# Altium PCB Power.PcbDoc
Units mm, origin at the board's own origin, x right, y up, seen from the top; angles counter-clockwise.
Board outline 56.52 x 52.07 mm, 2 copper layers (Top Layer, Bottom Layer); 56 components, 47 nets, 171 pads, 39 vias.
Unrouted connection lines stored in the file: 1.
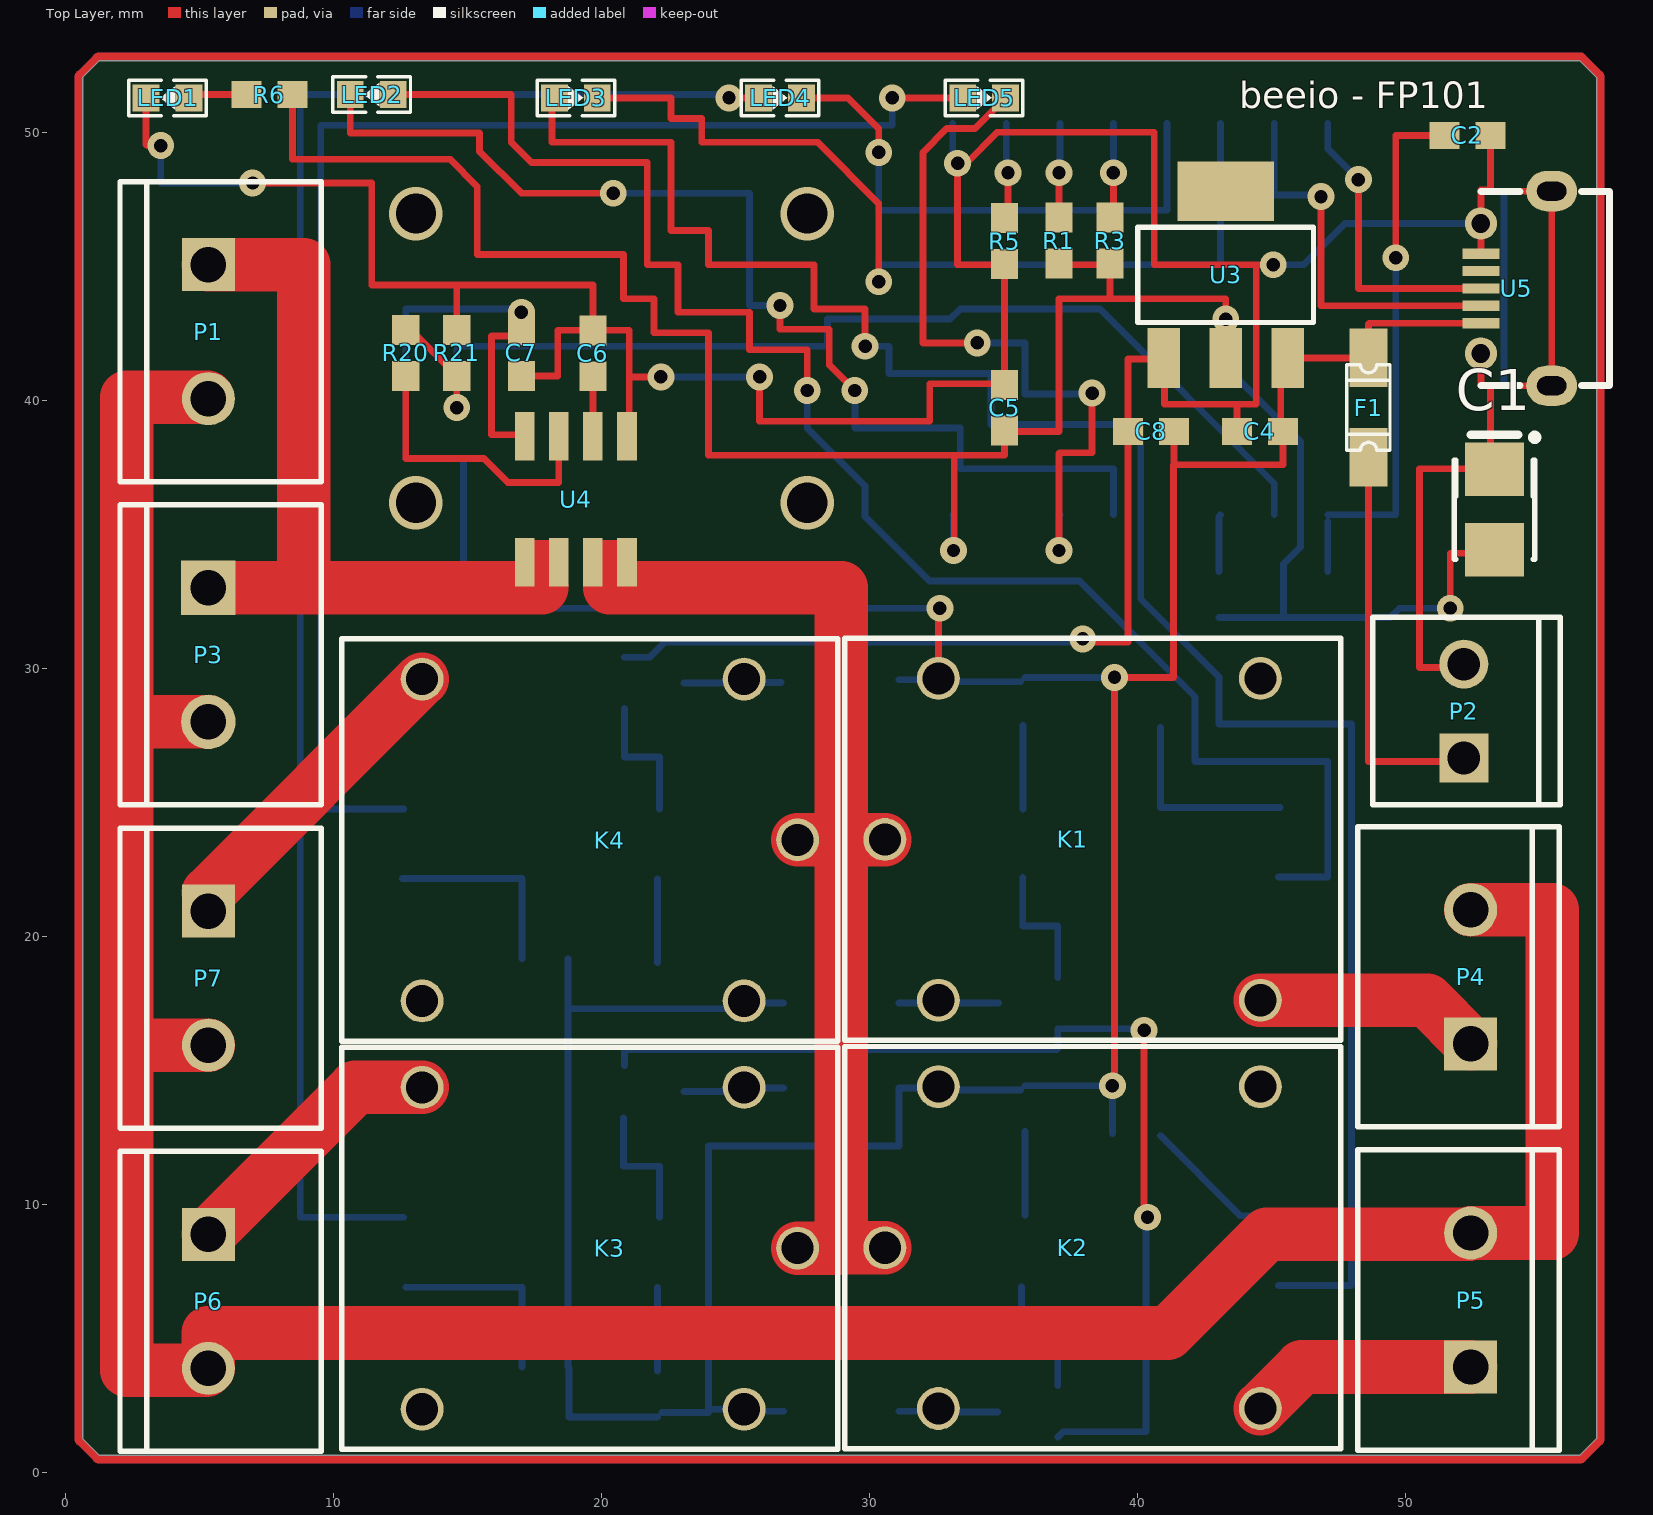
[diagram p0: Top Layer view]
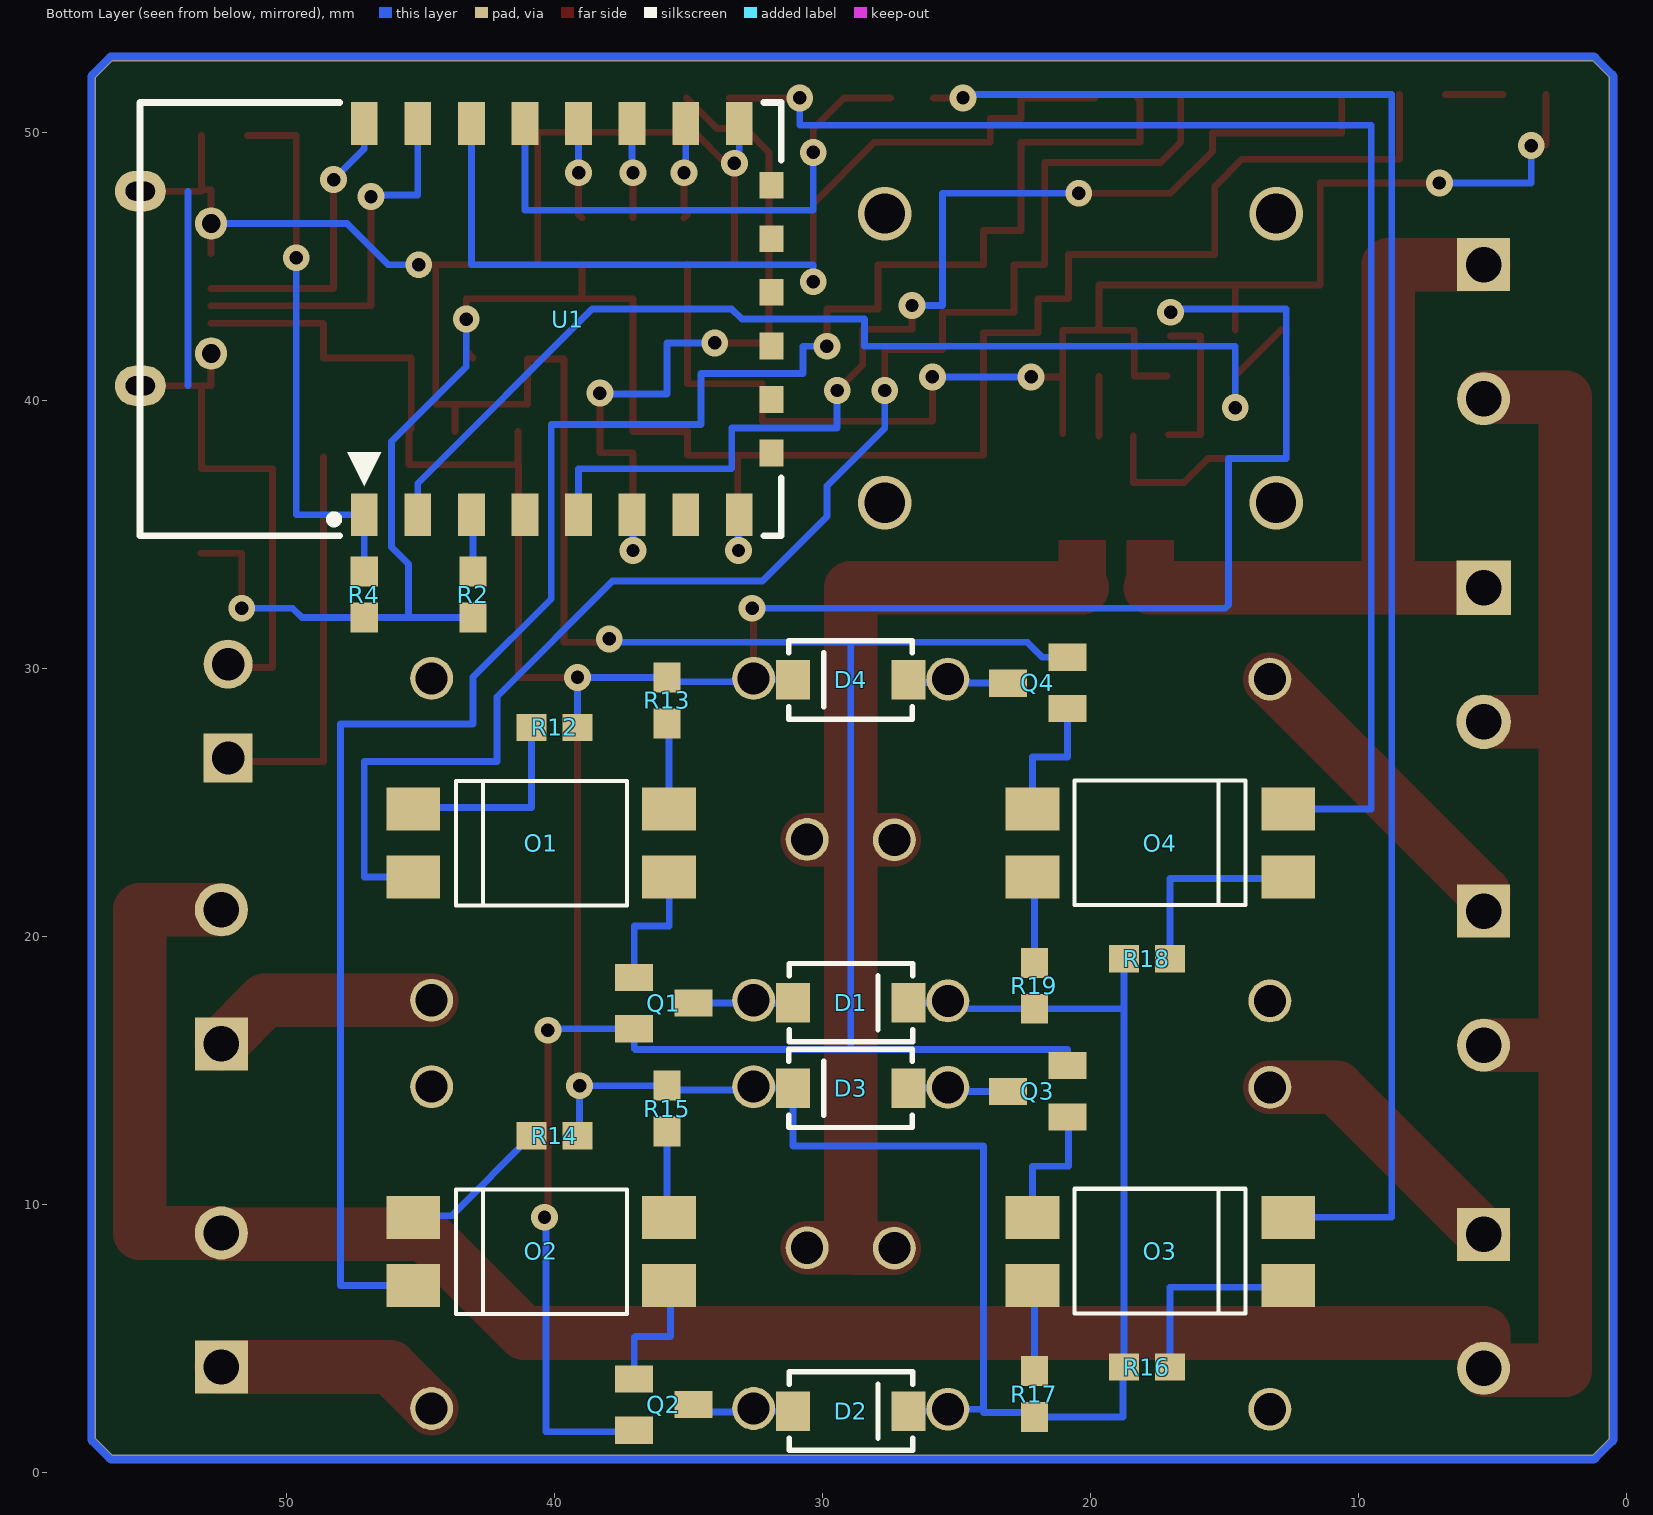
[diagram p1: Bottom Layer view, seen from below]

## Layer stack, top to bottom
Top Solder: solder mask 0.0102, Solder Resist, Dk 3.5
Top Layer: signal copper 0.0356
Dielectric 1: dielectric 0.32, FR-4, Dk 4.8
Bottom Layer: signal copper 0.0356
Bottom Solder: solder mask 0.0102, Solder Resist, Dk 3.5

## Board outline
0.635,1.27 0.635,52.07 1.27,52.705 56.515,52.705 57.15,52.07 57.15,1.27 56.515,0.635 1.27,0.635

## Design rules (kind name [scope] priority, off if disabled: settings)
Clearance [All] p1: gap=0.254
PolygonConnect [All] p1: connectstyle=Relief reliefconductorwidth=0.254 reliefentries=4 polygonreliefangle="90 Angle" airgapwidth=0.254
RoomDefinition Power [InComponentClass('Power')] p1: confinementstyle=ConfineIn formatcopy=TRUE lockcomponents=FALSE outline 0.635,0.635 57.15,0.635 57.15,52.705 0.635,52.705
RoutingVias [All] p1: holewidth=0.711 width=1.27 viastyle="Through Hole" minholewidth=0.711 minwidth=1.27 maxholewidth=0.711 maxwidth=1.27
SolderMaskExpansion [All] p1: expansion=0.102
Width [All] p1: maxlimit=0.254 minlimit=0.254 preferedwidth=0.254
30 further rules are at their usual default settings.

## Components (designator, comment, footprint, x,y, rotation, side; value= is the part's Value field where it differs from the comment)
C1 "100uF 6V3" SMT_C_Tantalum_B 53.34,35.941 r270 top
C2 "100nF" 0603 52.324,49.911 r0 top
C4 "10uF" 0603 44.577,38.862 r0 top
C5 "10uF" 0603 35.052,39.751 r270 top
C6 "1nF" 0603 19.685,41.783 r270 top
C7 "100nF" 0603 17.018,41.783 r90 top
C8 "100nF" 0603 40.513,38.862 r0 top
D1 "1N4007" SMA-DIODE 28.956,17.526 r180 bottom
D2 "1N4007" SMA-DIODE 28.956,2.286 r180 bottom
D3 "1N4007" SMA-DIODE 28.956,14.351 r0 bottom
D4 "1N4007" SMA-DIODE 28.956,29.591 r0 bottom
F1 "1A 6V SMD1206" 1206L 48.641,39.751 r90 top
K1 "SRD-5V" SRD-05VDC-SL-C 37.973,23.749 r0 top
K2 "SRD-5V" SRD-05VDC-SL-C 37.973,8.509 r0 top
K3 "SRD-5V" SRD-05VDC-SL-C 19.939,8.255 r180 top
K4 "SRD-5V" SRD-05VDC-SL-C 19.939,23.495 r180 top
LED1 "BLUE" SMT_LED_0603 3.81,51.308 r180 top
LED2 "RED" SMT_LED_0603 11.43,51.435 r180 top
LED3 "RED" SMT_LED_0603 19.05,51.308 r0 top
LED4 "RED" SMT_LED_0603 26.67,51.308 r0 top
LED5 "RED" SMT_LED_0603 34.29,51.308 r0 top
O1 "PC817" DIL4-SMD 40.513,23.495 r270 bottom
O2 "PC817" DIL4-SMD 40.513,8.255 r270 bottom
O3 "PC817" DIL4-SMD 17.399,8.255 r90 bottom
O4 "PC817" DIL4-SMD 17.399,23.495 r90 bottom
P1 "PWR 220V IN" SCREWTERMINAL-5MM-2#1 5.334,45.085 r270 top
P2 "PWR 5V 800mA OUT" SCREWTERMINAL-3.5MM-2 52.197,26.67 r90 top
P3 "AC/DC" SCREWTERMINAL-5MM-2#2 5.334,33.02 r270 top
P4 "LAMP" SCREWTERMINAL-5MM-2#1 52.451,16.002 r90 top
P5 "PUMP" SCREWTERMINAL-5MM-2#1 52.451,3.937 r90 top
P6 "FAN" SCREWTERMINAL-5MM-2#1 5.334,8.89 r270 top
P7 "FOG" SCREWTERMINAL-5MM-2#1 5.334,20.955 r270 top
Q1 "C1815" SOT23 35.941,17.526 r270 bottom
Q2 "C1815" SOT23 35.941,2.54 r270 bottom
Q3 "C1815" SOT23 21.971,14.224 r90 bottom
Q4 "C1815" SOT23 21.971,29.464 r90 bottom
R1 "103" 0603 37.084,45.974 r90 top
R2 "103" 0603 43.053,32.766 r90 bottom
R3 "103" 0603 38.989,45.974 r90 top
R4 "103" 0603 47.117,32.766 r90 bottom
R5 "103" 0603 35.052,45.974 r270 top
R6 "470" 0603 7.62,51.435 r180 top
R12 "102" 0603 40.005,27.813 r0 bottom
R13 "561" 0603 35.814,28.829 r270 bottom
R14 "102" 0603 40.005,12.573 r0 bottom
R15 "561" 0603 35.814,13.589 r270 bottom
R16 "102" 0603 17.907,3.937 r180 bottom
R17 "561" 0603 22.098,2.921 r90 bottom
R18 "102" 0603 17.907,19.177 r180 bottom
R19 "561" 0603 22.098,18.161 r90 bottom
R20 "224 (1%)" 0603 12.7,41.783 r90 top
R21 "104 (1%)" 0603 14.605,41.783 r90 top
U1 "ESP_12_E" ESP_12_E_L 47.117,35.052 r90 bottom
U3 "LM1117 3v3" SOT223 43.307,44.704 r0 top
U4 "ACS712 20A" SO08 19.05,36.322 r0 top
U5 "Micro USB B 5S DIP" USB_MICRO_5S_B 52.832,44.196 r270 top

## Footprints (in the part's own frame and the unit in brackets; to place one, negate y for a bottom-side part, rotate by r counter-clockwise, add the part's x,y. Pads: shape width x height; smd on the part's side, far side on the other; paste and mask are expansions set on the pad)
0603 [mil]
  rect 44x40 smd: 1(-33.46,0) 2(34,0)
1206L [mil]
  rect 86x56 smd: P$1(-72.83,0) P$2(73,0)
  silkscreen extent -63,-31 63,32
DIL4-SMD [mil]
  rect 63x79 smd: 1(-50,-187.8) 2(50,-187.8) 3(50,188) 4(-50,188)
  silkscreen extent -91,-125 92,126
ESP_12_E_L [mm]
  rect 1.6x1 smd: 1(0.7,0) 2(0.7,-2) 3(0.7,-4) 4(0.7,-6) 5(0.7,-8) 6(0.7,-10) 7(0.7,-12) 8(0.7,-14) 15(15.3,-14) 16(15.3,-12) 17(15.3,-10) 18(15.3,-8) 19(15.3,-6) 20(15.3,-4) 21(15.3,-2) 22(15.3,0)
  rect 1x0.9 smd: 9(3,-15.2) 10(5,-15.2) 11(7,-15.2) 12(9,-15.2) 13(11,-15.2) 14(13,-15.2)
  silkscreen extent -0.08,-15.57 16.08,8.37, body extent 0,-15.49 16,8.51, height 2.75
SCREWTERMINAL-3.5MM-2 [mil]
  rect 72x72 hole 48: 1(0,0)
  round 72 hole 48: 2(138,0)
  silkscreen extent -69,-142 207,134
SCREWTERMINAL-5MM-2#1 [mil]
  rect 78x78 hole 52: 1(0,0)
  round 78 hole 52: 2(197,0)
  silkscreen extent -122,-130 319,166
SCREWTERMINAL-5MM-2#2 [mil]
  rect 80x80 hole 52: 1(0,0)
  round 80 hole 52: 2(197,0)
  silkscreen extent -122,-130 319,166
SMA-DIODE [mil]
  rect 50x58 smd: A(-84.65,0) C(85,0)
  silkscreen extent -91,-57 91,58
SMT_C_Tantalum_B [mm]
  rect 2x2.2 smd: 1(-1.5,0) 2(1.5,0)
  silkscreen extent -2.82,-1.5 1.85,1.63, body extent -1.75,-1.4 1.75,1.4, height 1.9
SMT_LED_0603 [mm]
  rect 1x1 smd: 1(-0.8,0) 2(0.8,0)
  silkscreen extent -1.45,-0.66 1.45,0.66, body extent -0.81,-0.4 0.81,0.4, height 0.6
SO08 [mil]
  rect 29x71 smd: 1(-75,-92.52) 2(-25,-92.52) 3(25,-92.52) 4(75,-92.52) 5(75,93) 6(25,93) 7(-25,93) 8(-75,93)
SOT23 [mil]
  rect 40x56 smd: 1(-37.4,-43.31) 2(38,-43.31) 3(0,44)
SOT223 [mil]
  rect 48x88 smd: 1(-91,-122) 2(0,-122) 3(91,-122)
  rect 142x87 smd: 4(0,123)
  silkscreen extent -129,-70 129,70
SRD-05VDC-SL-C [mm]
  round 1.6 hole 1.2: COIL0(-5.39,-6.12) COIL1(-5.39,5.893) SWCLOSED(6.629,-6.12) SWCOMMON(-7.39,-0.12) SWOPEN(6.629,5.893)
  silkscreen extent -8.89,-7.62 9.63,7.39
USB_MICRO_5S_B [mil]
  rect 15x54 smd: 1(51,0) 2(25.5,0) 3(0,0) 4(-25.5,0) 5(-51,0)
  oval 59.06x74.8 hole 27.56 slot 43.31 at 90 deg: 6(-143,104) 7(143,104)
  round 47.24 hole 27.5: 8(95.5,0) 9(-95.5,0)
  silkscreen extent -143,0 143,189, body extent -161,-9 161,204, height 105

## Part data
C1: library part SMT_C_Tantalum_B, "Capacitor, SM Tantalum; Body 3.5 x 2.8 mm (LxW typ)"
C2 C4 C5 C6 C7 C8: library part CAP0603
D1 D2 D3 D4: library part DIODESMA
F1: library part 1206L
K1 K2 K3 K4: library part RELAYPTH
LED1 LED2 LED3 LED4 LED5: library part SMT_LED_0603, "SMT LED"
P1 P3 P4 P5 P6 P7: library part M025MM
P2: library part M023.5MM
Q1 Q2 Q3 Q4: library part TRANSISTOR_NPNSOT23
R1 R2 R3 R4 R5 R6 R12 R13 R14 R15 R16 R17 R18 R19 R20 R21: library part RESISTOR0603
U1: "ESP-12 Wi-Fi Module by AI-Thinker"
U3: library part V_REG_LM1117SOT223
U4: library part ACS712
U5: library part USB_Micro_5S_B, "USB micro female SMT with 4 fixed foot"

## Via types
v1: diameter 1, hole 0.5, Top Layer to Bottom Layer, 34 vias
v2: diameter 2, hole 1.5, Top Layer to Bottom Layer, 4 vias
v3: diameter 1, hole 0.5, Top Layer to Bottom Layer, tented bottom, 1 vias

## Nets (pads, with @x,y where several pads share a name; then routed paths per layer and width w, separated by ;. In a path a pad name is that pad's centre, name@x,y a point inside that pad or via, vN(x,y) a via of type N, cw(c..) or ccw(c..) an arc to the next point about the centre after c; other vN are vias at no path point)
AC/DC: P1.1 P3.1 U4.1 U4.2 | length 28.1
  Top Layer w2: P3.1 8.89,33.02 ; P1.1 8.89,45.085 8.89,33.02 ; 17.78,33.02 8.89,33.02
AC/DC+: K1.SWCOMMON K2.SWCOMMON K3.SWCOMMON K4.SWCOMMON U4.3 U4.4 | length 39.6
  Top Layer w2: 20.32,33.02 28.956,33.02 28.956,23.622 ; K3.SWCOMMON 28.822,8.375 28.956,8.509 28.956,23.622 ; K4.SWCOMMON@27.336,23.622 28.956,23.622 ; 29.076,8.389 K2.SWCOMMON ; K1.SWCOMMON@30.576,23.622 28.956,23.622
AC/DC-: P1.2 P3.2 P4.2 P5.2 P6.2 P7.2 | length 116.5
  Top Layer w2: 2.286,15.951 P7.2 ; 2.286,28.016 P3.2 ; P6.2@5.258,3.81 2.286,3.81 2.286,40.132 P1.2@5.283,40.132 ; P6.2 5.334,5.207 41.148,5.207 44.831,8.89 P5.2@52.4,8.89 ; P5.2 55.499,8.941 55.499,21.006 P4.2
ADC: R20.2 R21.1 U1.2 | length 41.6
  Top Layer w0.254: R20.2 12.891,42.647 R21.1 v1(14.605,39.751)
  Bottom Layer w0.254: v1(14.605,39.751) 14.605,42.037 28.448,42.037 28.448,43.053 33.02,43.053 33.401,43.434 38.608,43.434 45.117,36.925 U1.2
ADC_EX: R20.1 U4.7 | length 10.9
  Top Layer w0.254: R20.1 12.7,37.846 15.621,37.846 16.51,36.957 18.415,36.957 U4.7
EN: R2.2 U1.3 | length 2.1
  Bottom Layer w0.254: R2.2 43.053,35.688 U1.3
FAN: LED4.2 U1.19 | length 20.6
  Top Layer w0.254: LED4.2 29.21,51.308 30.353,50.165 v1(30.353,49.276)
  Bottom Layer w0.254: v1@30.607,49.403 30.353,49.149 30.353,47.117 41.117,47.117 U1.19
FOG: LED5.2 U1.6 | length 27.7
  Top Layer w0.254: v1(34.036,42.164) 32.004,42.164 32.004,49.276 32.893,50.165 33.947,50.165 LED5.2 ; v1(37.084,34.417) 37.084,38.034 37.117,38.067 38.321,38.067 v1(38.321,40.292)
  Bottom Layer w0.254: v1(34.036,42.164) 35.814,42.164 35.814,40.259 v1@38.354,40.259 ; v1(37.084,34.417) 37.084,35.719 U1.6
GND: C1.1 C2.2 C4.1 C5.1 C6.1 C7.1 C8.1 LED1.2 P2.2 Q1.2 Q2.2 Q3.2 Q4.2 R5.2 R21.2 U1.15 U3.1 U4.5 U5.5 U5.6 U5.7 U5.8 U5.9 | length 227.3
  Top Layer w0.254: LED1.2@3.01,51.435 3.01,49.568 3.048,49.53 v1(3.556,49.53) ; v1(6.985,48.133) 11.43,48.133 11.43,44.323 14.605,44.323 ; R21.2 14.605,44.323 ; C7.1@17.145,40.933 18.376,40.933 18.376,42.633 C6.1 ; U4.5@21.043,38.772 21.043,40.894 ; v1(22.225,40.894) 21.043,40.894 ; v1(25.908,40.894) 25.908,39.243 32.258,39.243 32.258,40.64 35.052,40.64 R5.2@35.052,45.085 ; R5.2 R5.2@35.052,45.085 ; v1@38.1,30.988 39.663,30.988 C8.1 39.663,41.568 41.021,41.568 41.021,39.878 43.727,39.878 ; v1@40.259,9.652 v1(40.259,16.51) ; C4.1 43.727,39.878 ; v3(45.085,45.085) 44.45,45.085 ; P2.2@51.943,30.048 50.546,30.048 50.546,37.465 C1.1@53.062,37.465 ; U5.8 52.832,40.564 53.188,40.564 ; U5.5 U5.9 52.832,47.879 53.137,47.879 ; C1.1@53.188,37.465 53.188,40.564 ; C2.2 53.188,47.828 U5.6 U5.7 53.188,40.564 ; 14.605,44.323 19.685,44.323 C6.1 ; C6.1 21.043,42.633 21.043,40.894 ; R5.2@35.052,45.085 33.299,45.085 v1(33.299,48.87) 33.63,48.87 34.79,50.03 40.64,50.03 40.64,45.085 44.45,45.085 ; 43.727,39.878 44.45,39.878 44.45,45.085
  Bottom Layer w0.254: v1(3.556,49.53) 3.556,48.133 v1(6.985,48.133) ; Q3.2 20.871,15.791 28.956,15.791 ; Q4.2 21.793,30.429 22.352,30.988 28.956,30.988 ; v1(22.225,40.894) v1(25.908,40.894) ; U1.15 33.117,49.052 v1(33.299,48.87) ; Q2.2@37.041,1.321 37.244,1.524 40.335,1.524 v1@40.335,9.652 ; v1@38.1,30.988 28.956,30.988 ; v1@40.259,16.561 Q1.2 37.041,15.832 37,15.791 28.956,15.791 ; v3(45.085,45.085) 46.228,45.085 47.765,46.622 U5.9 ; 53.696,40.564 53.696,47.828 ; 28.956,15.791 28.956,30.988
  other v1: 40.386,9.525 37.973,31.115
GPIO0: R1.2 U1.17 | length 3
  Top Layer w0.254: R1.2 v1(37.084,48.514)
  Bottom Layer w0.254: 37.117,49.055 U1.17
GPIO2: R3.2 U1.18 | length 3.1
  Top Layer w0.254: R3.2 39.116,46.965 v1(39.116,48.514)
  Bottom Layer w0.254: 39.117,49.023 U1.18
GPIO15: R5.1 U1.16 | length 3.6
  Top Layer w0.254: R5.1@35.179,46.824 35.052,46.951 35.179,47.078 v1(35.179,48.514)
  Bottom Layer w0.254: v1@35.117,48.576 U1.16
GPIO16: U1.4
LAMP: LED2.2 U1.5 | length 42.7
  Top Layer w0.254: LED2.2 10.63,50 15.456,50 15.456,49.314 17.018,47.752 v1(20.447,47.752) ; v1(26.67,43.561) 26.67,42.672 28.511,42.672 28.511,41.338 v1(29.464,40.386)
  Bottom Layer w0.254: v1(20.447,47.752) 25.527,47.752 25.527,43.561 v1(26.67,43.561) ; v1(29.464,40.386) 29.464,38.989 33.401,38.989 33.401,37.464 39.117,37.464 U1.5
NetC6_2: C6.2 U4.6 | length 2.2
  Top Layer w0.254: U4.6 C6.2
NetD1_A: D1.A K1.COIL0 Q1.3 | length 3.7
  Bottom Layer w0.254: D1.A K1.COIL0@32.559,17.526 ; K1.COIL0@32.607,17.526 Q1.3
NetD2_A: D2.A K2.COIL0 Q2.3 | length 3.7
  Bottom Layer w0.254: D2.A K2.COIL0@32.559,2.286 ; K2.COIL0@32.583,2.262 Q2.3@34.799,2.262
NetD3_A: D3.A K3.COIL0 Q3.3 | length 3.6
  Bottom Layer w0.254: Q3.3 K3.COIL0@25.305,14.224 ; K3.COIL0@25.432,14.351 D3.A
NetD4_A: D4.A K4.COIL0 Q4.3 | length 3.6
  Bottom Layer w0.254: Q4.3 K4.COIL0@25.305,29.464 ; K4.COIL0@25.329,29.488 D4.A@26.703,29.488
NetK1_SWCLOSED: K1.SWCLOSED P4.1 | length 8.5
  Top Layer w2: K1.SWCLOSED 50.824,17.629 P4.1
NetK2_SWCLOSED: K2.SWCLOSED P5.1 | length 8.5
  Top Layer w2: K2.SWCLOSED 46.15,3.937 P5.1
NetK3_SWCLOSED: K3.SWCLOSED P6.1 | length 10.2
  Top Layer w2: P6.1 10.819,14.375 K3.SWCLOSED
NetK4_SWCLOSED: K4.SWCLOSED P7.1 | length 11.3
  Top Layer w2: P7.1@5.334,21.639 K4.SWCLOSED
NetLED1_1: LED1.1 R6.2 | length 2.1
  Top Layer w0.254: LED1.1@4.61,51.435 R6.2
NetLED2_1: LED2.1 O1.2 | length 60.3
  Top Layer w0.254: LED2.1 16.637,51.435 16.637,49.657 17.399,48.895 21.717,48.895 21.717,45.085 22.86,45.085 22.86,43.307 25.527,43.307 25.527,41.91 27.686,41.91 v1(27.686,40.386)
  Bottom Layer w0.254: v1(27.686,40.386) 27.686,38.989 29.845,36.83 29.845,35.687 32.258,33.274 37.846,33.274 42.164,28.956 42.164,26.543 47.117,26.543 47.117,22.225 O1.2
NetLED3_1: LED3.1 O2.2 | length 75.2
  Top Layer w0.254: LED3.1 18.161,51.219 18.161,49.657 22.606,49.657 22.606,46.355 24.003,46.355 24.003,45.085 27.94,45.085 27.94,43.434 29.845,43.434 v1(29.845,42.037)
  Bottom Layer w0.254: v1(29.845,42.037) 30.734,42.037 30.734,41.021 34.544,41.021 34.544,39.116 40.132,39.116 40.132,32.614 43.053,29.693 43.053,27.94 48.006,27.94 48.006,6.985 O2.2
NetLED4_1: LED4.1 O3.2 | length 62.6
  Top Layer w0.254: v1(24.765,51.308) LED4.1
  Bottom Layer w0.254: O3.2 8.763,9.525 8.763,51.435 v1@24.511,51.435
NetLED5_1: LED5.1 O4.2 | length 53.6
  Top Layer w0.254: v1(30.861,51.308) LED5.1
  Bottom Layer w0.254: O4.2 9.525,24.765 9.525,50.292 30.861,50.292 v1(30.861,51.308)
NetO1_1: O1.1 R12.2 | length 7.5
  Bottom Layer w0.254: R12.2 40.869,24.821 O1.1@45.339,24.821
NetO1_3: O1.3 Q1.1 | length 5.1
  Bottom Layer w0.254: O1.3@35.73,22.217 35.73,20.404 37.041,20.404 Q1.1
NetO1_4: O1.4 R13.2 | length 3.1
  Bottom Layer w0.254: O1.4 R13.2@35.738,27.889
NetO2_1: O2.1 R14.2 | length 5.7
  Bottom Layer w0.254: R14.2 43.861,9.581 O2.1@45.339,9.581
NetO2_3: O2.3 Q2.1 | length 5
  Bottom Layer w0.254: O2.3@35.687,6.934 35.687,5.08 36.998,5.08 37.041,5.037 Q2.1@37.041,3.236
NetO2_4: O2.4 R15.2 | length 3.1
  Bottom Layer w0.254: O2.4@35.814,9.601 R15.2
NetO3_1: O3.1 R16.2 | length 7.3
  Bottom Layer w0.254: O3.1@12.7,6.914 17.043,6.914 R16.2
NetO3_3: O3.3 Q3.1 | length 5.1
  Bottom Layer w0.254: Q3.1@20.828,13.231 20.828,11.43 22.174,11.43 O3.3
NetO3_4: O3.4 R17.2 | length 3.1
  Bottom Layer w0.254: R17.2 O3.4@22.098,6.909
NetO4_1: O4.1 R18.2 | length 7.5
  Bottom Layer w0.254: O4.1@12.573,22.169 17.043,22.169 R18.2
NetO4_3: O4.3 Q4.1 | length 5.1
  Bottom Layer w0.254: Q4.1 20.871,26.713 22.182,26.713 22.174,26.705 O4.3
NetO4_4: O4.4 R19.2 | length 3.1
  Bottom Layer w0.254: R19.2 O4.4@22.098,22.149
NRST: C2.1 R4.2 U1.1 | length 20.4
  Top Layer w0.254: v1(49.657,45.339) 49.657,49.911 C2.1
  Bottom Layer w0.254: R4.2 U1.1@47.117,35.498 ; U1.1 49.657,35.752 v1(49.657,45.339)
PUMP: LED3.2 U1.20 | length 34.7
  Top Layer w0.254: LED3.2 22.606,51.308 22.606,50.546 23.749,50.546 23.749,49.657 28.067,49.657 30.353,47.371 v1(30.353,44.45)
  Bottom Layer w0.254: v1(30.353,44.45) 30.353,45.085 43.117,45.085 U1.20
RX: U1.21 U5.2 | length 13.9
  Top Layer w0.254: 46.863,43.548 U5.2 ; 46.863,43.561 v1(46.863,47.625)
  Bottom Layer w0.254: U1.21 45.117,47.689 46.355,47.689
TX: U1.22 U5.3 | length 11.2
  Top Layer w0.254: v1(48.26,48.26) 48.26,44.196 U5.3
  Bottom Layer w0.254: U1.22 47.117,49.403 v1(48.26,48.26)
VDD3V3: C1.2 C5.2 R1.1 R2.1 R3.1 R4.1 R6.1 U1.8 U3.2 | length 88.6
  Top Layer w0.254: R6.1 8.47,49.022 14.351,49.022 15.367,48.006 15.367,45.466 20.828,45.466 20.828,43.815 21.971,43.815 21.971,42.545 24.003,42.545 24.003,37.973 33.172,37.973 ; v1@33.172,34.417 33.172,37.973 ; C5.2 35.052,37.973 33.172,37.973 ; C5.2@35.077,38.862 37.084,38.862 37.084,43.815 38.989,43.815 ; R1.1@37.084,45.085 38.989,45.085 38.989,43.815 ; U3.2@43.053,41.605 43.307,41.859 v1(43.307,43.053) 43.307,43.815 38.989,43.815 ; v1@51.689,32.512 51.689,34.314 C1.2@53.213,34.314
  Bottom Layer w0.254: U1.8 33.147,35.722 v1(33.147,34.417) ; R2.1 45.466,31.916 ; v1(43.307,43.053) 43.307,41.275 46.101,38.481 46.101,34.544 45.466,33.909 45.466,31.916 ; v1(51.689,32.258) 49.784,32.258 49.442,31.916 45.466,31.916
VDD5V: C4.2 C7.2 C8.2 D1.C D2.C D3.C D4.C F1.P$2 K1.COIL1 K2.COIL1 K3.COIL1 K4.COIL1 R12.1 R13.1 R14.1 R15.1 R16.1 R17.1 R18.1 R19.1 U3.3 U4.8 U5.1 | length 158.1
  Top Layer w0.254: C7.2@17.018,42.418 15.9,42.418 15.9,38.735 U4.8@17.094,38.735 ; K1.COIL1 v1@32.583,32.258 ; v1@39.155,14.517 v1(39.155,29.679) 41.363,29.679 41.363,37.604 ; C8.2 41.377,37.617 45.441,37.617 C4.2 ; C4.2@45.364,38.938 45.364,41.605 F1.P$2 48.641,42.875 48.666,42.901 U5.1
  Bottom Layer w0.254: v1@16.891,43.434 12.7,43.434 12.7,37.846 14.859,37.846 14.859,32.385 14.986,32.258 v1(32.639,32.258) ; R16.1 18.757,17.311 ; R18.1 18.757,17.311 ; R16.1@18.796,3.898 18.796,2.071 R17.1 ; R17.1@22.262,2.235 24.003,2.235 24.003,12.192 31.115,12.192 D3.C K2.COIL1@32.507,14.351 ; 24.13,2.362 K3.COIL1 ; K4.COIL1@25.165,17.311 R19.1 18.757,17.311 ; K3.COIL1@25.38,2.286 D2.C ; K4.COIL1@25.38,17.526 D1.C ; D4.C K1.COIL1@32.507,29.591 ; K2.COIL1@32.583,14.275 R15.1@35.65,14.275 ; K1.COIL1@32.583,29.515 R13.1@35.65,29.515 ; R15.1 v1(39.077,14.439) R14.1@39.077,12.651 ; R13.1 v1(39.155,29.679) R12.1
  other v1: 17.018,43.307
VOUT5V: F1.P$1 P2.1 | length 14.7
  Top Layer w0.254: F1.P$1 48.641,26.543 P2.1@51.943,26.543
pads on no net: K1.SWOPEN K2.SWOPEN K3.SWOPEN K4.SWOPEN U1.7 U1.9 U1.10 U1.11 U1.12 U1.13 U1.14 U3.4 U5.4
copper on no net:
  other v2: 13.081,36.195 27.686,36.195 13.081,46.99 27.686,46.99

## Other copper
Top Layer:
  rectangle net AC/DC+: 19.431,33.02 21.209,34.798
  rectangle net AC/DC: 16.891,33.02 18.669,34.798
Multi-Layer:
  lines w0.3: 0.485,1.27 ccw(c0.635,1.27) 0.529,1.164 ; 0.485,1.27 ccw(c0.635,1.27) 0.529,1.164 0.529,1.164 ; 0.485,1.27 0.485,52.07 ; 0.485,52.07 cw(c0.635,52.07) 0.529,52.176 0.529,52.176 ; 0.485,52.07 cw(c0.635,52.07) 0.529,52.176 ; 0.529,1.164 1.164,0.529 ; 0.529,52.176 1.164,52.811 ; 1.164,0.529 ccw(c1.27,0.635) 1.27,0.485 ; 1.164,0.529 1.164,0.529 ccw(c1.27,0.635) 1.27,0.485 ; 1.164,52.811 cw(c1.27,52.705) 1.27,52.855 ; 1.164,52.811 1.164,52.811 cw(c1.27,52.705) 1.27,52.855 ; 1.27,0.485 56.512,0.485 ; 1.27,52.855 56.515,52.855 ; 56.512,0.485 ccw(c56.515,0.635) 56.621,0.529 56.621,0.529 ; 56.512,0.485 ccw(c56.515,0.635) 56.621,0.529 ; 56.515,52.855 cw(c56.515,52.705) 56.621,52.811 56.621,52.811 ; 56.515,52.855 cw(c56.515,52.705) 56.621,52.811 ; 56.621,0.529 57.256,1.164 ; 56.621,52.811 57.256,52.176 ; 57.256,1.164 ccw(c57.15,1.27) 57.3,1.27 ; 57.256,1.164 57.256,1.164 ccw(c57.15,1.27) 57.3,1.27 ; 57.256,52.176 cw(c57.15,52.07) 57.3,52.07 ; 57.256,52.176 57.256,52.176 cw(c57.15,52.07) 57.3,52.07 ; 57.3,1.27 57.3,52.067 ; 57.3,52.067 ccw(c57.15,52.07) 57.3,52.07 ; 57.3,52.067 ccw(c57.15,52.07) 57.3,52.07

## Silkscreen, mask and mechanical layers (free items; w line width, h text height)
Top Overlay:
  text "beeio - FP101" at 43.815,50.927 h1

## Text inside footprints (layer, text, board x,y; h text height)
U1: Mechanical 13 "CUTOUT POLYGON" at 54.432,36.551 h0.25 r270; Mechanical 13 "ANTENNA AREA" at 54.94,36.551 h0.25 r270
U3: Mechanical 2 ">NAME" at 42.481,49.225 h0.63